# EAGLE board Timer (EAGLE 5.11)
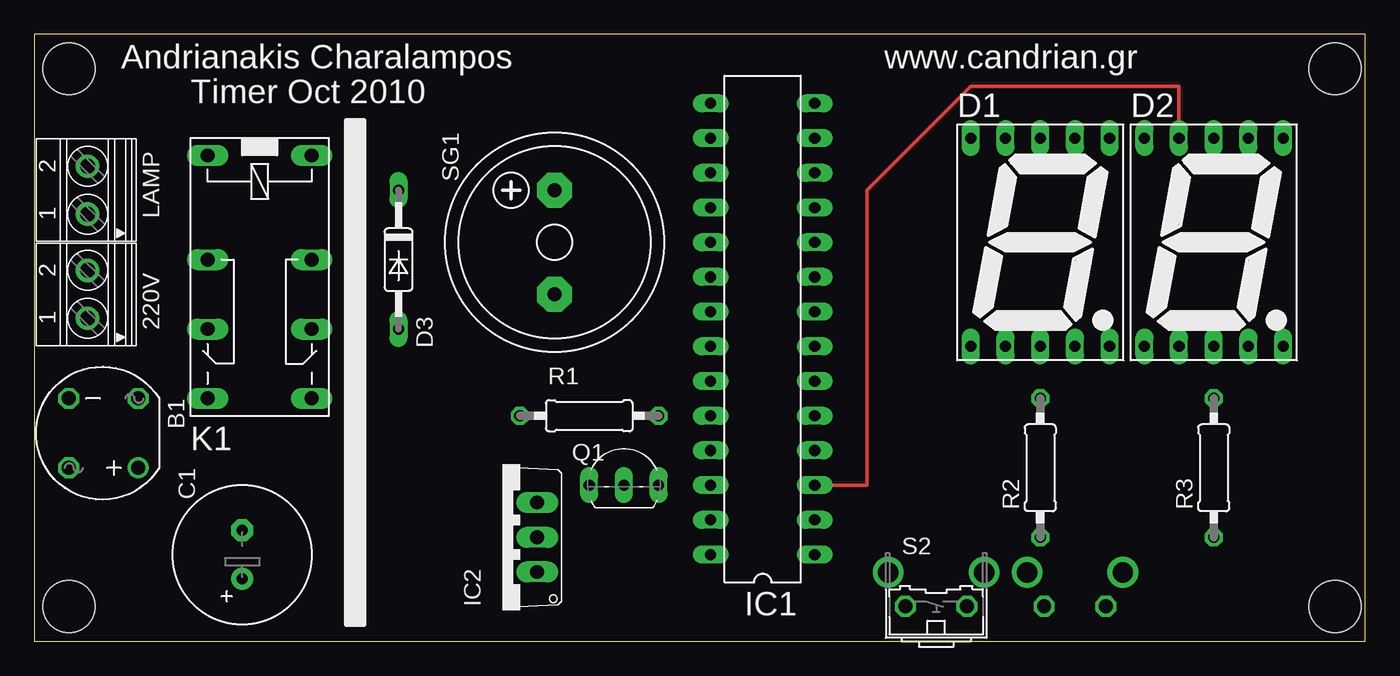
[diagram p0: board, top side]
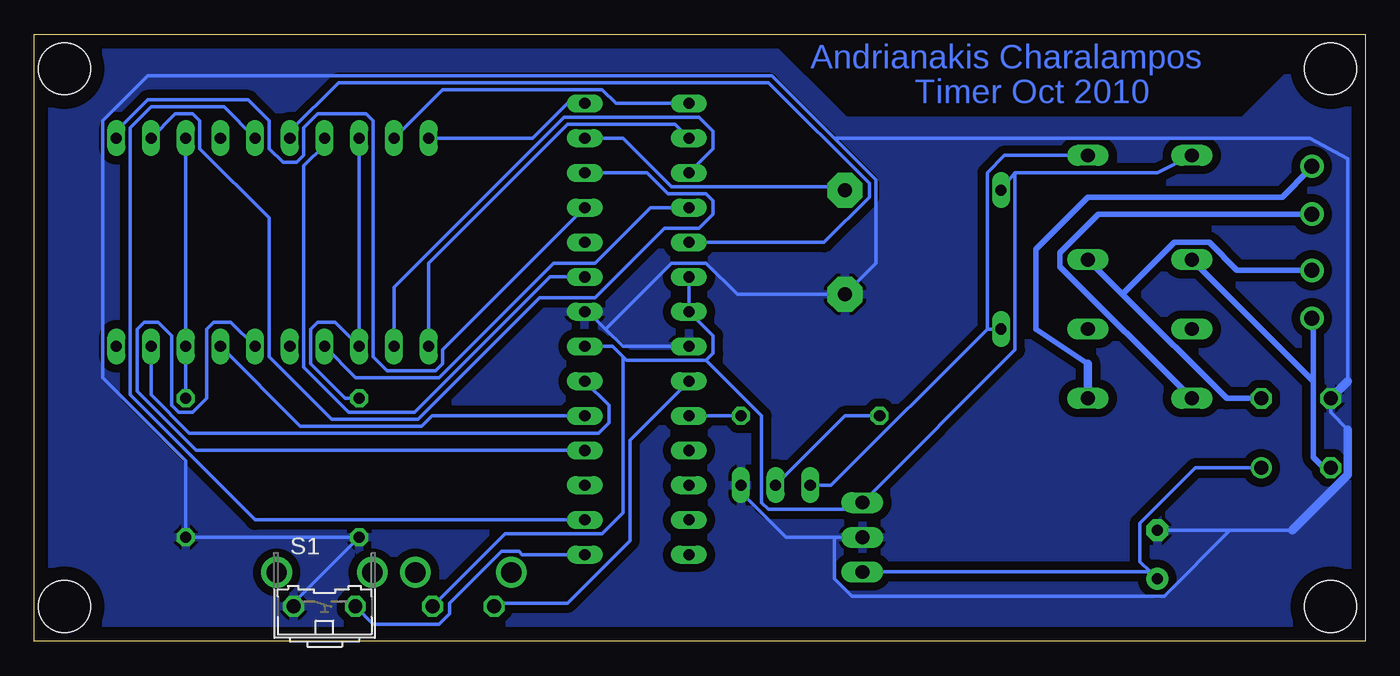
[diagram p1: board, bottom side, seen from below]

Size 97.46 x 44.44 mm. Coordinates in mm from the lower left corner, seen from the top.
Outline: 0,0 97.46,0 97.46,44.44 0,44.44 0,0
Copper layers (1*16): Top 0.035mm / dielectric 1.5mm / Bottom 0.035mm
Design rules "default *": minimum track width 10mil, minimum drill 24mil, track to track 8mil, track to pad 8mil, pad to pad 8mil, via to via 8mil, smd to smd 8mil, copper to edge 40mil, drill to drill 8mil, minimum pad ring 10mil, minimum via ring 8mil, stop-mask expansion 4mil, vias tented up to drill 0mil, thermal gap 10mil
Holes 3.81 mm at 2.54,41.91 2.54,2.54 95.25,41.91 95.25,2.54

## Footprints (pad centres in the part's own frame; a part is rotated, then mirrored left to right if it is on the bottom)
1751248 = drill 1.1 pad 1.7 round: 1 -1.75,-0.1; 2 1.75,-0.1
RB1A = drill 1.016 round: + -2.54,2.54 | drill 1.016 octagon: - 2.54,-2.54; AC1 2.54,2.54; AC2 -2.54,-2.54
E3,5-10 = drill 0.813 pad 1.6 round: + -1.778,0 | drill 0.813 pad 1.6 octagon: - 1.778,0
7SEG-13 = drill 0.813 long: 1 -5.08,-7.62; 2 -2.54,-7.62; 3 0,-7.62; 4 2.54,-7.62; 5 5.08,-7.62; 6 5.08,7.62; 7 2.54,7.62; 8 0,7.62; 9 -2.54,7.62; 10 -5.08,7.62
DO35-10 = drill 0.813 long: A 5.08,0; C -5.08,0
DIL28-3 = drill 0.813 long: 1 -16.51,-3.81; 2 -13.97,-3.81; 3 -11.43,-3.81; 4 -8.89,-3.81; 5 -6.35,-3.81; 6 -3.81,-3.81; 7 -1.27,-3.81; 8 1.27,-3.81; 9 3.81,-3.81; 10 6.35,-3.81; 11 8.89,-3.81; 12 11.43,-3.81; 13 13.97,-3.81; 14 16.51,-3.81; 15 16.51,3.81; 16 13.97,3.81; 17 11.43,3.81; 18 8.89,3.81; 19 6.35,3.81; 20 3.81,3.81; 21 1.27,3.81; 22 -1.27,3.81; 23 -3.81,3.81; 24 -6.35,3.81; 25 -8.89,3.81; 26 -11.43,3.81; 27 -13.97,3.81; 28 -16.51,3.81
TO220V = drill 1.016 long: 1 -2.54,-2.54; 2 0,-2.54; 3 2.54,-2.54
351 = drill 1.016 long: 1 -3.81,-3.81; 16 -3.81,3.81; O1 8.89,-3.81; O2 8.89,3.81; P1 3.81,-3.81; P2 3.81,3.81; S1 13.97,-3.81; S2 13.97,3.81
TO92-EBC = drill 0.813 long: B 0,-1.27; C -2.54,-1.27; E 2.54,-1.27
0207/10 = drill 0.813 octagon: 1 -5.08,0; 2 5.08,0
B3F-31XX = drill 1.016 octagon: 1 -2.261,-1.245; 2 2.261,-1.245 | drill 1.499 pad 2.159 round: 3 -3.505,1.245; 4 3.505,1.245
F/HMB = drill 1.016 pad 2.54 octagon: + 3.81,0; - -3.81,0

## Placement (x,y rotation side)
220V  [1751248]  3.81,25.4 90 top
B1  [RB1A]  5.08,15.24 180 top
C1  1000uF  [E3,5-10]  15.24,6.35 90 top
D1  [7SEG-13]  73.66,29.21 0 top
D2  [7SEG-13]  86.36,29.21 0 top
D3  1N4148  [DO35-10]  26.67,27.94 270 top
IC1  MEGA8-P  [DIL28-3]  53.34,22.86 90 top
IC2  7805TV  [TO220V]  34.29,7.62 90 top
K1  351  [351]  16.51,31.75 270 top
LAMP  [1751248]  3.81,33.02 90 top
Q1  BC548  [TO92-EBC]  43.18,12.7 0 top
R1  1k  [0207/10]  40.64,16.51 180 top
R2  330  [0207/10]  73.66,12.7 90 top
R3  330  [0207/10]  86.36,12.7 90 top
S1  [B3F-31XX]  76.2,3.81 0 bottom
S2  [B3F-31XX]  66.04,3.81 0 top
SG1  F/HMB  [F/HMB]  38.1,29.21 90 top

## Library data of the parts
220V LAMP = con-phoenix-350
B1 = rectifier
C1 R1-R3 = rcl
D1 D2 = special
D3 = diode
IC1 = atmel
IC2 = linear
K1 = relay
Q1 = transistor-npn
S1 S2 = switch-omron
SG1 = buzzer

## Nets
GND: B1.- C1.- IC1.8 IC1.22 IC2.2 Q1.E R2.1 R3.1 S1.1 SG1.-
N$2: 220V.2 B1.AC2 K1.P2
N$3: B1.+ C1.+ IC2.1
N$4: IC1.13 SG1.+
N$5: IC1.1 S1.2
N$6: IC1.23 S2.1
N$7: D2.10 IC1.2
N$8: D2.9 IC1.3
N$9: D2.1 IC1.4
N$10: D2.2 IC1.5
N$11: D2.4 IC1.6
N$12: D2.6 IC1.11
N$13: D2.7 IC1.12
N$14: D1.9 IC1.15
N$15: D1.10 IC1.14
N$16: D1.1 IC1.16
N$17: D1.2 IC1.17
N$18: D1.4 IC1.18
N$19: D1.7 IC1.9
N$20: D1.6 IC1.19
N$21: D1.3 D1.8 R2.2
N$22: D3.A K1.16 Q1.C
N$23: Q1.B R1.2
N$24: IC1.24 R1.1
N$25: 220V.1 B1.AC1 K1.P1
N$27: K1.S2 LAMP.2
N$28: K1.S1 LAMP.1
N$29: D2.3 D2.8 R3.2
VCC: D3.C IC1.7 IC1.20 IC1.21 IC2.3 K1.1 S2.2

## Tracks (layer width: path | path; a pad name or v marks a point on that pad's centre or on a via)
GND
  Bottom 0.254: Q1.E 45.72,10.92 42.42,7.62 38.86,7.62 | 38.86,7.62 IC2.2 | B1.- 2.54,16.76 1.27,15.49 | 9.91,8.13 C1.- | 5.33,8.13 9.91,8.13 | 38.86,7.62 38.86,4.57 37.59,3.3 14.73,3.3 9.91,8.13 | S1.1 78.49,2.79 R2.1 R3.1 86.36,13.21 92.46,19.3 92.46,38.1 89.15,41.4 43.43,41.4 38.86,36.83 | IC1.22 54.36,21.59 55.63,22.86 | 55.63,22.86 56.9,24.13 IC1.8 | 55.63,22.86 50.8,27.69 48.26,27.69 45.97,25.4 SG1.- 35.81,27.69 35.81,33.78 38.86,36.83 | 38.86,36.83 4.06,36.83 1.27,35.31 1.27,19.05
  Bottom 0.61: 1.27,15.49 1.27,12.19 5.33,8.13 | B1.- 1.27,19.05
  pour Bottom (isolate 0.61): 0,44.45 0,0 97.79,0 97.79,44.45 44.45,44.45 38.1,38.1 8.89,38.1 2.54,44.45
N$2
  Bottom 0.254: 4.06,27.18 220V.2
  Bottom 0.406: B1.AC2 10.16,17.78 17.78,25.4 | 17.78,25.4 K1.P2 | 4.06,27.18 9.4,27.18 11.43,29.21 13.97,29.21 17.78,25.4
N$3
  Bottom 0.254: B1.+ 12.45,12.7 16.51,8.64 16.51,5.84 15.75,5.08 | 15.75,5.08 IC2.1 | C1.+ 15.75,5.08
N$4
  Bottom 0.254: IC1.13 54.36,36.83 50.8,33.27 38.35,33.27 SG1.+
N$5
  Bottom 0.254: IC1.1 61.72,6.35 61.98,6.6 63.25,6.6 67.06,2.79 67.06,2.03 67.82,1.27 72.64,1.27 S1.2
N$6
  Bottom 0.254: IC1.23 53.85,14.73 53.85,7.37 58.42,2.79 63.75,2.79 S2.1
N$7
  Bottom 0.254: IC1.2 81.28,8.89 90.42,18.03 90.42,37.59 88.9,39.12 83.57,39.12 D2.10
N$8
  Top 0.254: IC1.3 60.96,11.43 60.96,33.02 68.58,40.64 83.82,40.64 D2.9
N$9
  Bottom 0.254: IC1.4 85.6,13.97 89.92,18.29 89.92,22.86 89.41,23.37 88.39,23.37 87.38,22.35 87.38,17.27 86.87,16.76 85.85,16.76 84.84,17.78 84.84,22.86 84.33,23.37 83.06,23.37 D2.1
N$10
  Bottom 0.254: IC1.5 68.33,16.51 69.09,15.75 77.98,15.75 D2.2
N$11
  Bottom 0.254: IC1.6 55.37,17.27 55.37,16 56.13,15.24 86.11,15.24 88.9,18.03 D2.4
N$12
  Bottom 0.254: IC1.11 67.56,21.34 67.56,20.32 68.07,19.81 71.63,19.81 72.64,20.83 72.64,38.1 73.15,38.61 76.71,38.61 77.72,37.59 77.72,35.56 78.23,35.05 79.25,35.05 80.26,36.07 80.26,38.1 81.79,39.62 89.15,39.62 91.44,37.34 D2.6
N$13
  Bottom 0.254: IC1.12 52.58,34.29 51.05,32.77 48.26,32.77 47.75,32.26 47.75,31.24 48.77,30.23 51.31,30.23 56.39,25.15 60.45,25.15 69.34,16.26 75.69,16.26 80.26,20.83 80.26,30.99 85.34,36.07 85.34,38.1 85.85,38.61 87.12,38.61 D2.7
N$14
  Bottom 0.254: IC1.15 54.86,39.37 55.88,40.39 67.56,40.39 D1.9
N$15
  Bottom 0.254: D1.10 60.96,36.83 58.42,39.37 IC1.14
N$16
  Bottom 0.254: D1.1 68.58,27.69 58.42,37.85 50.55,37.85 IC1.16
N$17
  Bottom 0.254: D1.2 71.12,25.91 58.67,38.35 48.77,38.35 47.75,37.34 47.75,36.07 IC1.17
N$18
  Bottom 0.254: IC1.18 52.32,31.75 56.39,27.69 59.44,27.69 67.82,19.3 73.91,19.3 D1.4
N$19
  Bottom 0.254: IC1.9 59.69,26.67 69.6,16.76 74.42,16.76 77.72,20.07 77.72,34.8 76.2,36.32 D1.7
N$20
  Bottom 0.254: IC1.19 39.62,29.21 36.32,32.51 36.32,33.53 43.69,40.89 75.18,40.89 78.74,37.34 D1.6
N$21
  Bottom 0.254: R2.2 74.68,17.78 77.22,20.32 77.22,22.86 76.71,23.37 75.44,23.37 D1.3 D1.8
N$22
  Bottom 0.254: D3.A 27.69,22.86 | 27.69,22.86 39.12,11.43 Q1.C | K1.16 26.42,35.56 27.69,34.29 27.69,22.86
N$23
  Bottom 0.254: R1.2 38.1,16.51 Q1.B
N$24
  Bottom 0.254: R1.1 IC1.24
N$25
  Bottom 0.254: 3.81,23.62 220V.1
  Bottom 0.406: B1.AC1 3.05,12.7 3.81,13.46 3.81,19.05 | 3.81,19.05 3.81,23.62 | 3.81,19.05 K1.P1
N$27
  Bottom 0.254: LAMP.2 4.06,34.54
  Bottom 0.406: 20.32,20.32 24.13,22.86 24.13,28.7 20.32,32.51 6.1,32.51 4.06,34.54
  Bottom 0.61: 20.32,20.32 K1.S2
N$28
  Bottom 0.254: 4.06,31.24 LAMP.1
  Bottom 0.406: K1.S1 22.35,27.43 22.35,28.45 19.56,31.24 4.06,31.24
N$29
  Bottom 0.254: R3.2 D2.3 D2.8
VCC
  Bottom 0.254: IC1.20 IC1.21 47.75,22.35 47.75,21.08 48.26,20.57 | IC1.7 55.12,21.59 54.36,20.83 | 54.36,20.83 54.1,20.57 48.26,20.57 | 54.36,20.83 54.36,9.4 55.88,7.87 62.99,7.87 S2.2 | 25.65,34.29 15.24,34.29 K1.1 | 25.65,34.29 D3.C | 25.65,34.29 25.65,21.34 IC2.3 37.34,9.65 43.69,9.65 44.2,10.16 44.2,16.51 48.26,20.57

## Text on the board
Bottom: Andrianakis Charalampos | Timer Oct 2010
tNames: Andrianakis Charalampos | www.candrian.gr | Timer Oct 2010